# EAGLE board Optronik (EAGLE 7.5.0)
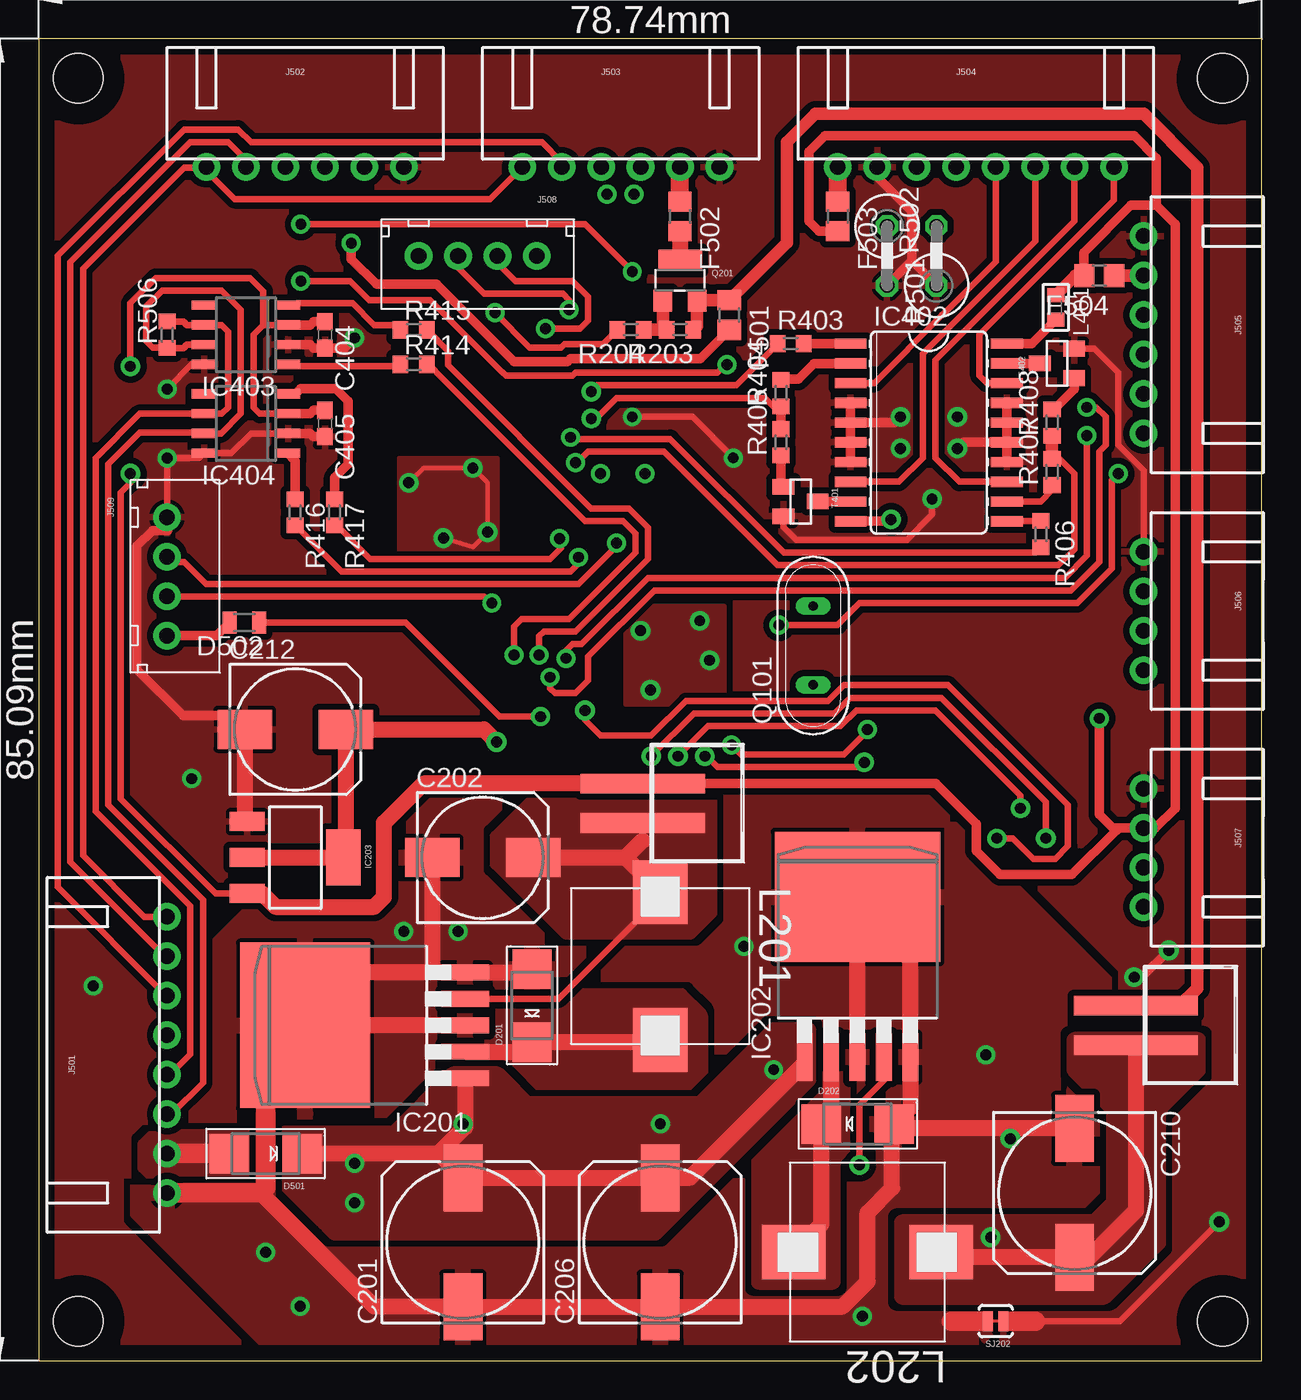
[diagram p0: board, top side]
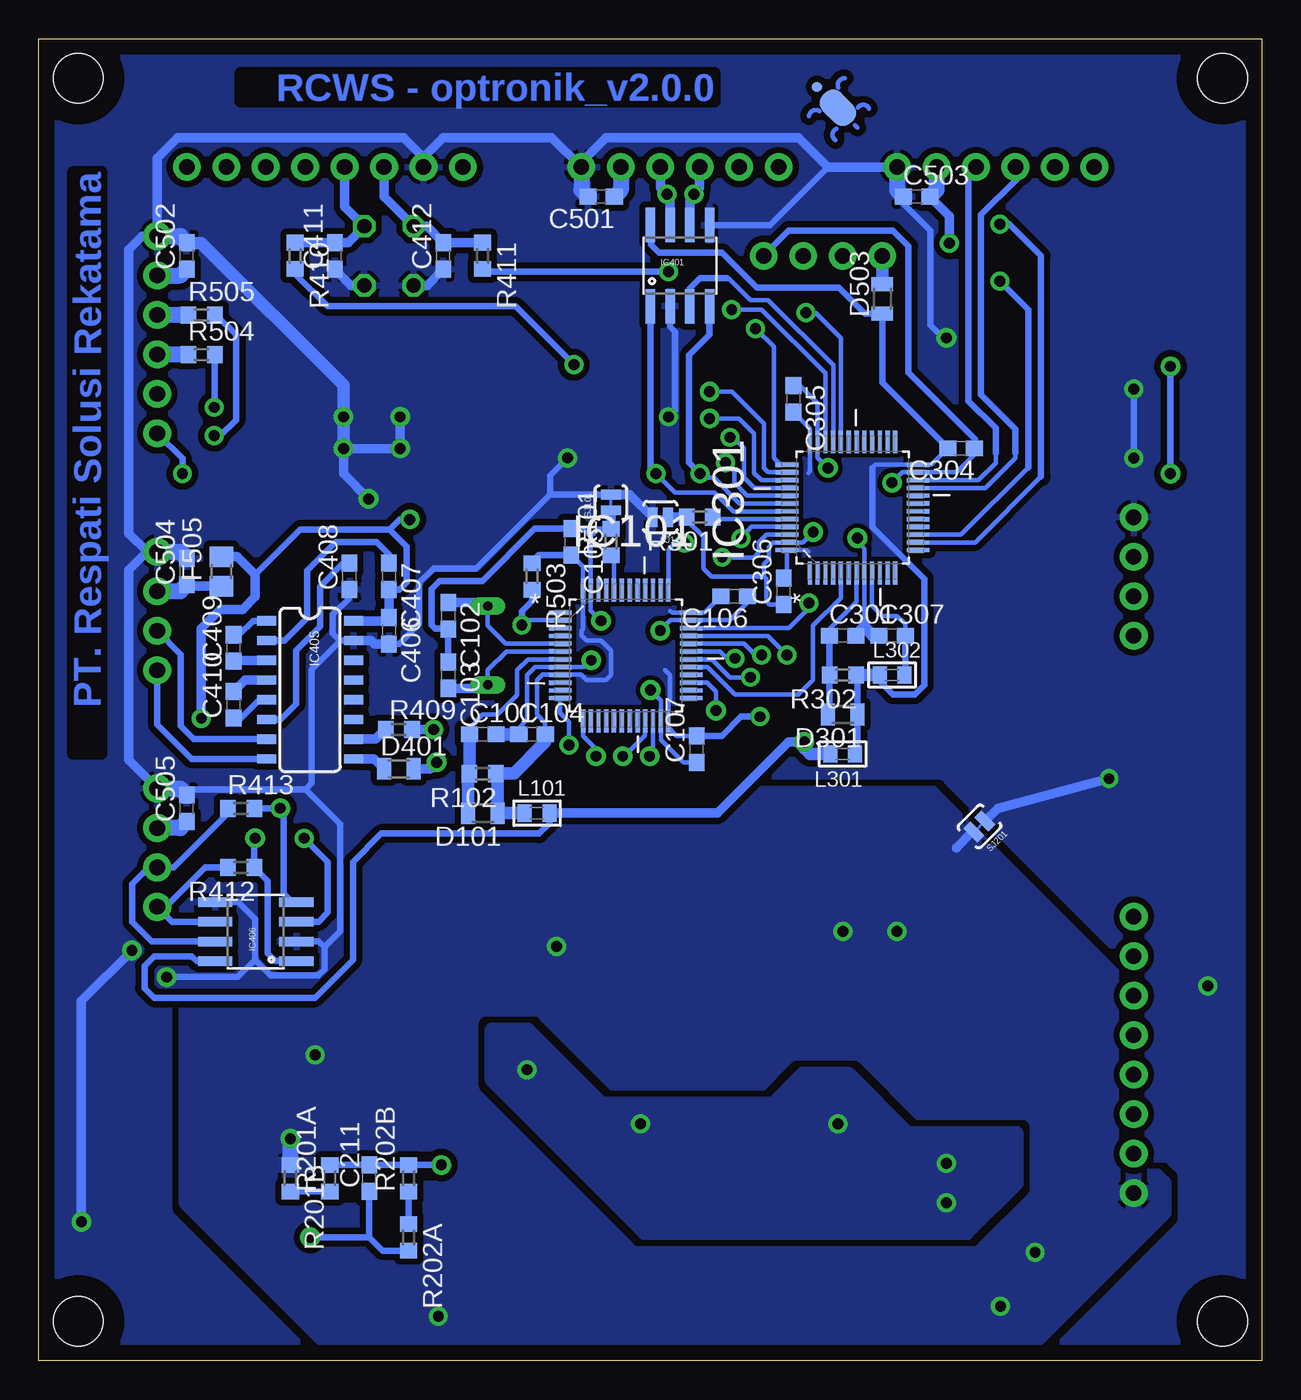
[diagram p1: board, bottom side, seen from below]

Size 78.74 x 85.09 mm. Coordinates in mm from the lower left corner, seen from the top.
Outline: 0,0 78.74,0 78.74,85.09 0,85.09 0,0
Copper layers (1*16): Top 0.035mm / dielectric 1.5mm / Bottom 0.035mm
Design rules "default": minimum track width 10mil, minimum drill 24mil, track to track 8mil, track to pad 8mil, pad to pad 8mil, via to via 8mil, smd to smd 8mil, copper to edge 40mil, drill to drill 8mil, minimum pad ring 10mil, minimum via ring 8mil, stop-mask expansion 4mil, vias tented up to drill 0mil, thermal gap 10mil
Net classes: 0 default: width 0.406 mm, drill 0.59 mm, clearance 0.305 mm; 1 ic: width 0.254 mm, drill 0.59 mm, clearance 0.203 mm; 2 power: width 0.61 mm, drill 0.59 mm, clearance 0.305 mm
Holes 3.2 mm at 2.54,2.54 76.2,2.54 76.2,82.55 2.54,82.55
tRestrict: area 0,0 to 5.1,5.1; area 73.7,0 to 78.7,5.1; area 73.7,80 to 78.7,85.1; area 0,80 to 5.1,85.1
bRestrict: area 0,0 to 5.1,5.1; area 73.7,0 to 78.7,5.1; area 73.7,80 to 78.7,85.1; area 0,80 to 5.1,85.1

## Footprints (pad centres in the part's own frame; a part is rotated, then mirrored left to right if it is on the bottom)
C0603 = smd 1.1 x 1: 1 -0.85,0; 2 0.85,0
153CLV-1012 = smd 4.3 x 2.5: + 4.15,0; - -4.15,0
153CLV-0810 = smd 3.5 x 2.5: + 3.25,0; - -3.25,0
MICROMELF-W = smd 0.9 x 1.4: A 0.95,0; C -0.95,0
SMADIODE = smd 2.54 x 2.54: A 2.349,0; C -2.349,0
L0805 = smd 1.3 x 1.5: 1 -0.95,0; 2 0.95,0
QFP50P900X900X160-48N = smd 1.473 x 0.279: 1 -4.216,2.743; 2 -4.216,2.261; 3 -4.216,1.753; 4 -4.216,1.245; 5 -4.216,0.762; 6 -4.216,0.254; 7 -4.216,-0.254; 8 -4.216,-0.762; 9 -4.216,-1.245; 10 -4.216,-1.753; 11 -4.216,-2.261; 12 -4.216,-2.743; 25 4.216,-2.743; 26 4.216,-2.261; 27 4.216,-1.753; 28 4.216,-1.245; 29 4.216,-0.762; 30 4.216,-0.254; 31 4.216,0.254; 32 4.216,0.762; 33 4.216,1.245; 34 4.216,1.753; 35 4.216,2.261; 36 4.216,2.743 | smd 0.279 x 1.473: 13 -2.743,-4.216; 14 -2.261,-4.216; 15 -1.753,-4.216; 16 -1.245,-4.216; 17 -0.762,-4.216; 18 -0.254,-4.216; 19 0.254,-4.216; 20 0.762,-4.216; 21 1.245,-4.216; 22 1.753,-4.216; 23 2.261,-4.216; 24 2.743,-4.216; 37 2.743,4.216; 38 2.261,4.216; 39 1.753,4.216; 40 1.245,4.216; 41 0.762,4.216; 42 0.254,4.216; 43 -0.254,4.216; 44 -0.762,4.216; 45 -1.245,4.216; 46 -1.753,4.216; 47 -2.261,4.216; 48 -2.743,4.216
D2PAK = smd 3.05 x 1.016: 1 10.305,-3.404; 2 10.305,-1.702; 3 10.305,0; 4 10.305,1.702; 5 10.305,3.404 | smd 8.38 x 10.66: 6 0,0
SOT223 = smd 1.219 x 2.235: 1 -2.311,-3.099; 2 0,-3.099; 3 2.311,-3.099 | smd 3.6 x 2.2: 4 0,3.099
SO08 = smd 0.61 x 2.21: 1 -1.905,-2.616; 2 -0.635,-2.616; 3 0.635,-2.616; 4 1.905,-2.616; 5 1.905,2.616; 6 0.635,2.616; 7 -0.635,2.616; 8 -1.905,2.616
SO20W = smd 0.66 x 2.032: 1 -5.715,-5.029; 2 -4.445,-5.029; 3 -3.175,-5.029; 4 -1.905,-5.029; 5 -0.635,-5.029; 6 0.635,-5.029; 7 1.905,-5.029; 8 3.175,-5.029; 9 4.445,-5.029; 10 5.715,-5.029; 11 5.715,5.029; 12 4.445,5.029; 13 3.175,5.029; 14 1.905,5.029; 15 0.635,5.029; 16 -0.635,5.029; 17 -1.905,5.029; 18 -3.175,5.029; 19 -4.445,5.029; 20 -5.715,5.029
SOIC-8 = smd 0.6 x 1.6: 1 -1.905,-2.7; 2 -0.635,-2.7; 3 0.635,-2.7; 4 1.905,-2.7; 5 1.905,2.7; 6 0.635,2.7; 7 -0.635,2.7; 8 -1.905,2.7
SO016 = smd 0.6 x 1.2: 1 -4.445,-2.8; 2 -3.175,-2.8; 3 -1.905,-2.8; 4 -0.635,-2.8; 5 0.635,-2.8; 6 1.905,-2.8; 7 3.175,-2.8; 8 4.445,-2.8; 9 4.445,2.8; 10 3.175,2.8; 11 1.905,2.8; 12 0.635,2.8; 13 -0.635,2.8; 14 -1.905,2.8; 15 -3.175,2.8; 16 -4.445,2.8
XH-2-VERT-SMD = smd 1.27 x 8: 1 -1.27,-0.5; 2 1.27,-0.5
XH-8-RA = drill 1 pad 1.778: 1 -8.89,0; 2 -6.35,0; 3 -3.81,0; 4 -1.27,0; 5 1.27,0; 6 3.81,0; 7 6.35,0; 8 8.89,0
XH-6-RA = drill 1 pad 1.778: 1 -6.35,0; 2 -3.81,0; 3 -1.27,0; 4 1.27,0; 5 3.81,0; 6 6.35,0
XH-4-RA = drill 1 pad 1.778: 1 -3.81,0; 2 -1.27,0; 3 1.27,0; 4 3.81,0
XH-4-VERT = drill 1 pad 1.778: 1 -3.81,0; 2 -1.27,0; 3 1.27,0; 4 3.81,0
L0603 = smd 0.9 x 1.1: 1 -0.794,0; 2 0.794,0
PA4342 = smd 3.5 x 4.1: P$1 0,4.75; P$2 0,-4.75
QS = drill 0.61 long: 1 -2.54,0; 2 2.54,0
SOT23-W = smd 1.2 x 1.4: 1 -1.1,-1.3; 2 1.1,-1.3 | smd 2.8 x 1.4: 3 0,1.3
R0603 = smd 1 x 1.1: 1 -0.85,0; 2 0.85,0
0411V = drill 0.914 octagon: 1 -2.54,0; 2 1.27,0
SJ_2S-TRACE = smd 0.635 x 1.27: 1 -0.508,0; 2 0.508,0
SOT23 = smd 1 x 1.4: 1 -0.95,-1.1; 2 0.95,-1.1; 3 0,1.1
KURRO-LOGO = smd 2.54 x 1.651 rotated 45 bottom: P$1 0,0 | smd 0.635 x 0.635 rotated 45 bottom: P$2 1.347,1.347

## Placement (x,y rotation side)
C101  100n  [C0603]  50.16,40.32 0 bottom
C102  22p  [C0603]  52.39,47.94 270 bottom
C103  22p  [C0603]  52.39,44.13 270 bottom
C104  100n  [C0603]  46.99,40.32 0 bottom
C105  100n  [C0603]  44.45,52.7 270 bottom
C106  100n  [C0603]  33.97,49.21 180 bottom
C107  100n  [C0603]  36.4,39.37 90 bottom
C201  470u/35V  [153CLV-1012]  27.3,7.62 90 top
C202  1000u/6V3  [153CLV-0810]  28.57,32.38 0 top
C206  470u/35V  [153CLV-1012]  40.01,7.62 90 top
C210  470u/35V  [153CLV-1012]  66.67,10.79 270 top
C211  10n  [C0603]  57.47,11.75 90 bottom
C212  1000u/6V3  [153CLV-0810]  16.51,40.64 0 top
C301  100n  [C0603]  26.99,46.67 0 bottom
C304  100n  [C0603]  19.37,58.74 180 bottom
C305  100n  [C0603]  30.16,61.91 270 bottom
C306  100n  [C0603]  30.8,49.53 90 bottom
C307  100n  [C0603]  23.81,46.67 0 bottom
C404  100n  [C0603]  18.41,66.04 270 top
C405  100n  [C0603]  18.41,60.33 270 top
C406  1u  [C0603]  56.2,46.99 270 bottom
C407  1u  [C0603]  56.2,50.48 270 bottom
C408  1u  [C0603]  58.74,50.48 90 bottom
C409  1u  [C0603]  66.2,45.88 90 bottom
C410  1u  [C0603]  66.2,42.23 90 bottom
C411  100n  [C0603]  59.69,71.12 90 bottom
C412  100n  [C0603]  52.7,71.12 90 bottom
C501  100n  [C0603]  42.55,74.93 180 bottom
C502  100n  [C0603]  69.22,71.12 90 bottom
C503  100n  [C0603]  22.23,74.93 0 bottom
C504  100n  [C0603]  69.22,50.8 90 bottom
C505  100n  [C0603]  69.22,35.56 90 bottom
D101  SCHOTTKY  [MICROMELF-W]  50.16,35.24 180 bottom
D201  SS34  [SMADIODE]  31.75,22.86 90 top
D202  SS34  [SMADIODE]  52.7,15.24 0 top
D301  SCHOTTKY  [MICROMELF-W]  26.99,41.59 180 bottom
D401  SCHOTTKY  [MICROMELF-W]  55.56,38.1 0 bottom
D501  SS34  [SMADIODE]  14.61,13.34 180 top
D502  SCHOTTKY  [MICROMELF-W]  13.23,47.51 180 top
D503  SCHOTTKY  [MICROMELF-W]  24.45,68.36 90 bottom
F501  500mA  [L0805]  44.45,67.31 270 top
F502  500mA  [L0805]  41.27,73.66 270 top
F503  500mA  [L0805]  51.44,73.66 270 top
F504  500mA  [L0805]  68.26,69.85 180 top
F505  500mA  [L0805]  66.99,50.8 90 bottom
IC101  STM32F103C8T6  [QFP50P900X900X160-48N]  40.96,45.4 0 bottom
IC201  LM2596S-5V  [D2PAK]  17.14,21.59 0 top
IC202  LM2596S-ADJ  [D2PAK]  52.7,29.84 270 top
IC203  [SOT223]  16.51,32.38 270 top
IC301  STM32F103C8T6  [QFP50P900X900X160-48N]  26.35,54.93 90 bottom
IC401  RS485SOIC  [SO08]  37.47,70.48 0 bottom
IC402  L293DD  [SO20W]  57.29,59.75 270 top
IC403  MCP2561-E/SN  [SOIC-8]  13.34,66.04 90 top
IC404  MCP2561-E/SN  [SOIC-8]  13.34,60.33 90 top
IC405  MAX232SOIC16  [SO016]  61.28,43.18 270 bottom
IC406  RS485SOIC  [SO08]  64.77,27.62 90 bottom
J201  [XH-2-VERT-SMD]  39.37,35.88 270 top
J202  [XH-2-VERT-SMD]  71.12,21.59 270 top
J501  PANEL  [XH-8-RA]  8.26,19.68 90 top
J502  SONY  [XH-6-RA]  17.14,76.83 0 top
J503  THERMAL_DALI_VIDEO  [XH-6-RA]  37.47,76.83 0 top
J504  THERMAL_DALI_MOTOR  [XH-8-RA]  60.33,76.83 0 top
J505  LRF_NOPTEL  [XH-6-RA]  71.12,66.04 270 top
J506  IMU  [XH-4-RA]  71.12,48.26 270 top
J507  GPS  [XH-4-RA]  71.12,33.02 270 top
J508  MCU_CAM_PROG  [XH-4-VERT]  28.26,71.12 180 top
J509  MCU_MAIN_PROG  [XH-4-VERT]  8.26,50.48 270 top
L101  FB_0603  [L0603]  46.67,35.24 0 bottom
L201  33uH  [PA4342]  40.01,25.4 180 top
L202  33uH  [PA4342]  53.34,6.99 90 top
L301  FB_0603  [L0603]  26.99,39.05 180 bottom
L302  FB_0603  [L0603]  23.81,44.13 0 bottom
L401  FB_0603  [L0603]  65.47,67.81 270 top
Q101  8MHz  [QS]  49.85,46.04 90 top
Q201  A03401  [SOT23-W]  41.27,69.53 0 top
R101  100K  [R0603]  41.91,52.7 90 bottom
R102  100K  [R0603]  50.16,37.78 180 bottom
R201A  120R  [R0603]  60.01,11.75 90 bottom
R201B  120R  [R0603]  62.55,11.75 270 bottom
R202A  1k  [R0603]  54.93,7.94 270 bottom
R202B  1k  [R0603]  54.93,11.75 90 bottom
R203  10k  [R0603]  41.27,66.36 180 top
R204  100R  [R0603]  38.1,66.36 180 top
R301  100K  [R0603]  36.2,54.29 180 bottom
R302  100K  [R0603]  26.99,44.13 180 bottom
R403  100R  [R0603]  48.4,65.47 0 top
R404  100R  [R0603]  47.76,62.29 90 top
R405  1k  [R0603]  47.76,59.12 90 top
R406  100R  [R0603]  64.52,53.2 270 top
R407  100R  [R0603]  65.23,57.21 90 top
R408  1k  [R0603]  65.23,60.39 90 top
R409  100R  [R0603]  55.56,40.64 0 bottom
R410  100R  [R0603]  62.23,71.12 270 bottom
R411  100R  [R0603]  50.16,71.12 270 bottom
R412  100  [R0603]  65.72,31.75 180 bottom
R413  100  [R0603]  65.72,35.56 0 bottom
R414  100R  [R0603]  24.13,64.14 0 top
R415  100R  [R0603]  24.13,66.36 0 top
R416  100R  [R0603]  16.51,54.61 270 top
R417  100R  [R0603]  19.05,54.61 270 top
R501  1R  [0411V]  54.61,70.48 270 top
R502  1R  [0411V]  57.78,71.75 90 top
R503  10k  [R0603]  46.99,50.48 270 bottom
R504  100R  [R0603]  68.26,64.77 0 bottom
R505  100R  [R0603]  68.26,67.31 0 bottom
R506  120R  [R0603]  8.26,66.04 90 top
SJ1  [SJ_2S-TRACE]  38.73,54.29 180 bottom
SJ101  [SJ_2S-TRACE]  41.91,55.24 90 bottom
SJ201  SOLDERJUMPERTRACE  [SJ_2S-TRACE]  18.19,34.38 225 bottom
SJ202  SOLDERJUMPERTRACE  [SJ_2S-TRACE]  61.59,2.54 180 top
T401  1N2222A  [SOT23]  49.03,55.31 270 top
T402  1N2222A  [SOT23]  65.54,64.2 90 top
U$1  KURRO_FOOTPRINT  [KURRO-LOGO]  27.3,80.64 0 top

## Library data of the parts
C101-C107 C201 C202 C206 C210 C212 C301 C304-C307 C406-C412 C501-C505 R101 R102 R201A R201B R202A R202B R203 R204 R301 R302 R403-R408 R410-R413 R501-R505 = resistor
C211 C404 C405 F501-F505 R409 R414-R417 = rcl
D101 D301 D401 D502 D503 = diode
D201 D202 D501 IC402 = adafruit
IC101 IC301 = ST Microelctronics_By_element14_Batch_1; LINK: https://www.tokopedia.com/embedded-world/stm32-stm32f103c8t6-lqfp48-arm-based-microcontroller-mcu-lqfp-48-au02; MPN: STM32F103CBT6; OC_FARNELL: 1606327; OC_NEWARK: 11N8296; PACKAGE: QFP-48; SUPPLIER: STMICROELECTRONICS
IC201 IC202 = ON Semiconductor_By_element14_Batch_1
IC203 SJ201 SJ202 U$1 = SparkFun
IC401 IC406 = SparkFun-DigitalIC
IC403 IC404 = microchip
IC405 = SparkFun-DigitalIC; PROD_ID: IC-08171
J201 J202 J501-J509 = SparkFun-Connectors
L101 L301 L302 L401 = rc-master
L201 L202 Q201 = scorpion
Q101 = special
R506 = rcl; DNP: T
SJ1 SJ101 = SparkFun-Passives
T401 T402 = SparkFun-DiscreteSemi

## Nets
+3V3: C212.+ IC203.2 IC203.4 IC406.8 L101.2 L301.2
+5V: C404.1 C405.1 C406.1 C407.2 C505.1 F503.2 F504.2 F505.2 IC203.3 IC402.10 IC403.3 IC404.3 IC405.16 J201.1 J507.2 L401.1
+12V: F501.1 J202.1 Q201.2 R203.1
+24V [power]: C201.+ C206.+ D501.C IC201.1 IC202.1
AGND [ic]: C101.2 C102.2 C103.1 C104.1 C105.1 C106.1 C107.1 IC101.8 IC101.23 IC101.35 IC101.47 R101.2 SJ101.1
AGND1 [ic]: C301.2 C304.1 C305.1 C306.1 C307.1 IC301.8 IC301.23 IC301.35 IC301.47 J508.1 R301.2 SJ1.1
BOOT0 [ic]: IC101.44 R101.1
BOOT1 [ic]: IC301.44 R301.1
BUS1_RXD [ic]: IC101.32 R415.2
BUS1_TXD [ic]: IC101.33 R414.2
BUS2_RXD [ic]: IC301.45 R417.2
BUS2_TXD [ic]: IC301.46 R416.2
BUS_CANH: IC403.7 IC404.7 J501.3 R506.1
BUS_CANL: IC403.6 IC404.6 J501.4 R506.2
FEED1: C211.2 IC202.4 R201A.2 R202B.2
GND: C212.- C404.2 C405.2 C406.2 C408.1 C411.1 C412.1 C501.2 C502.2 C503.1 C504.2 C505.2 IC203.1 IC401.2 IC401.5 IC402.4 IC402.5 IC402.6 IC402.7 IC402.14 IC402.15 IC402.16 IC402.17 IC403.2 IC403.8 IC404.2 IC404.8 IC405.15 IC406.2 IC406.5 J502.6 J503.6 J504.2 J505.1 J506.1 J507.1 J509.1 R501.2 R502.1 SJ1.2 SJ101.2 SJ201.1 SJ202.1 T401.2 T402.2
GPS_A_TX: IC406.6 J507.4 R412.2
GPS_B_RX: IC406.7 J507.3 R413.1
GPS_RTS [ic]: IC101.27 IC406.3
GPS_RXD [ic]: IC101.21 IC406.4 R413.2
GPS_TXD [ic]: IC101.22 IC406.1 R412.1
IMU_RX: IC405.7 J506.3
IMU_RXD [ic]: IC101.12 R409.2
IMU_TX: IC405.8 J506.4
IMU_TXD [ic]: D401.A IC101.13
LRF_EN [ic]: IC101.2 J505.6 R503.2
LRF_RXD [ic]: IC101.30 R504.2
LRF_TXD [ic]: IC101.31 R505.2
MCO [ic]: IC101.29 IC301.5
N$1 [ic]: IC301.30
N$2 [ic]: IC101.45
N$3 [ic]: IC301.6
N$4 [ic]: IC101.40
N$5 [power]: D201.C IC201.2 L201.P$1
N$6 [ic]: C103.2 IC101.6 Q101.1
N$7 [ic]: C102.1 IC101.5 Q101.2
N$8 [ic]: IC101.46
N$9 [ic]: IC301.31
N$10 [ic]: IC101.20
N$11 [ic]: IC101.3
N$12 [ic]: IC101.19
N$13 [ic]: IC101.42
N$14 [ic]: IC101.43
N$15 [power]: D501.A J501.2
N$16 [power]: D202.C IC202.2 L202.P$1
N$17 [ic]: R201A.1 R201B.2
N$18: R202A.1 R202B.1
N$19 [ic]: IC101.18
N$20 [ic]: IC101.38
N$21 [ic]: IC301.27
N$22: IC402.20 L401.2
N$23 [ic]: IC101.17
N$24 [ic]: IC301.2
N$25 [ic]: IC101.15
N$26 [ic]: IC101.14
N$27 [ic]: IC101.25
N$28 [ic]: IC101.26
N$29: C202.+ IC201.4 J201.2 L201.P$2
N$30 [ic]: IC101.28
N$31 [ic]: C408.2 IC405.6
N$32 [ic]: C409.2 IC405.1
N$33 [ic]: C410.2 IC405.4
N$34 [ic]: IC101.39
N$35: F503.1 J504.1
N$36 [ic]: IC301.16
N$37 [ic]: IC301.4
N$38 [ic]: IC301.1
N$39: Q201.1 R203.2 R204.1
N$40 [ic]: IC301.10
N$41 [ic]: D502.A J509.4
N$42 [ic]: IC101.16
N$43: IC402.12 R407.1
N$44 [ic]: IC301.11
N$45 [ic]: IC301.12
N$46 [ic]: IC301.13
N$47: C501.1 F502.1 J503.5
N$48: C502.1 F504.1 J505.2
N$49: IC403.1 R414.1
N$50: IC402.2 R404.2
N$51 [ic]: IC101.41
N$52: C503.2 F501.2 J502.5
N$53 [ic]: IC101.11
N$54 [ic]: IC101.10
N$55: C504.1 F505.1 J506.2
N$56: J505.3 R505.1
N$57 [ic]: IC101.4
N$58 [ic]: IC101.1
N$59: J505.4 R504.1
N$60 [ic]: IC301.3
N$61 [ic]: IC301.25
N$62 [ic]: IC301.26
N$63: C210.+ C211.1 J202.2 L202.P$2 R202A.2
N$64 [ic]: IC301.28
N$65 [ic]: IC301.29
N$66 [ic]: IC301.17
N$67: IC403.4 R415.1
N$68: C409.1 IC405.3
N$69: C410.1 IC405.5
N$70 [ic]: IC301.20
N$71: IC404.1 R416.1
N$72: C407.1 IC405.2
N$73: IC404.4 R417.1
N$74: IC405.10 R409.1
N$75: D401.C IC405.9
N$76 [ic]: IC301.18
N$77 [ic]: IC402.1 R403.2
N$78 [ic]: IC402.11 R406.1
N$79 [ic]: IC301.19
N$80 [ic]: D503.A J508.4
N$89: R405.1 T401.1
N$90: IC402.9 T401.3
N$91: IC402.19 T402.3
N$92: R408.2 T402.1
RST [ic]: C101.1 D101.A IC101.7 R102.2
RST1 [ic]: C301.1 D301.A IC301.7 R302.2
SONY_RXD [ic]: IC301.21 J502.3
SONY_TXD [ic]: IC301.22 J502.4
SWCLK1 [ic]: IC101.37 J509.2
SWCLK2 [ic]: IC301.37 J508.2
SWDIO1 [ic]: IC101.34 J509.3
SWDIO2 [ic]: IC301.34 J508.3
TH_FOCUS+: IC402.13 J504.7
TH_FOCUS-: IC402.18 J504.8
TH_FOCUS_DIR [ic]: IC301.41 R407.2 R408.1
TH_FOCUS_PLS [ic]: IC301.40 R406.2
TH_ZOOM+: IC402.3 J504.5
TH_ZOOM-: IC402.8 J504.6
TH_ZOOM_DIR [ic]: IC301.39 R404.1 R405.2
TH_ZOOM_PLS [ic]: IC301.38 R403.1
THERMAL_A_TX: IC401.6 J503.3
THERMAL_ADC_FOCUS [ic]: IC301.14 R411.2
THERMAL_ADC_ZOOM [ic]: IC301.15 R410.2
THERMAL_B_RX: IC401.7 J503.4
THERMAL_FB_FOCUS: C412.2 J504.3 R411.1 R501.1
THERMAL_FB_ZOOM: C411.2 J504.4 R410.1 R502.2
THERMAL_PWR_EN [ic]: IC301.32 R204.2
THERMAL_RTS [ic]: IC301.33 IC401.3
THERMAL_RXD [ic]: IC301.42 IC401.4
THERMAL_TXD [ic]: IC301.43 IC401.1
THERMAL_VDD: F502.2 Q201.3
V- [power]: C201.- C202.- C206.- C210.- D201.A D202.A IC201.3 IC201.5 IC201.6 IC202.3 IC202.5 IC202.6 J501.1 R201B.1 SJ201.2 SJ202.2
VDD [ic]: C104.2 C105.2 C106.2 C107.2 D101.C D502.C IC101.9 IC101.24 IC101.36 IC101.48 L101.1 R102.1 R503.1
VDD1 [ic]: C304.2 C305.2 C306.2 D301.C D503.C IC301.24 IC301.36 IC301.48 IC401.8 L301.1 L302.1 R302.1
VDDA1 [ic]: C307.2 IC301.9 L302.2
VIDEO-: J501.8 J502.1 J503.1
VIDEO_SONY+: J501.7 J502.2
VIDEO_THERMAL+: J501.6 J503.2

## Tracks (layer width: path | path; a pad name or v marks a point on that pad's centre or on a via)
+3V3  (via drill 0.7 pad 1.27)
  Top 1.016: IC203.2 IC203.4 19.76,32.54 C212.+ 28.65,40.64 v29.46,39.83
  Bottom 0.406: L101.2 45.88,34.59 46.53,33.93 56.69,33.93 58.52,32.11 58.52,25.81 60.96,23.37 71.32,23.37 71.93,23.98 71.93,25.4 71.32,26.01 68.89,26.01 68.59,25.72 IC406.8
  Bottom 0.61: L101.2 35.06,35.24 30.48,39.83 v29.46,39.83
  Bottom 0.813: L301.2 29.1,39.05 29.46,39.42 v29.46,39.83
+5V  (via drill 0.7 pad 1.22, 0.7 pad 1.27)
  Top 0.406: IC203.3 11.38,30.07 5.28,36.17 5.28,55.88 5.89,56.49 v5.89,57.1 | IC404.3 14.22,60.96 13.82,61.37 13.82,66.04 14.45,66.67 | IC403.3 14.45,66.67 | 14.45,66.67 14.45,68.86 13.61,69.7 7.52,69.7 5.89,68.07 v5.89,64.01
  Top 0.61: IC403.3 17.46,66.67 17.68,66.89 C404.1 | IC404.3 17.46,60.96 17.68,61.17 C405.1 | J201.1 57.75,37.15 60.35,34.54 60.35,32.82 61.87,31.29 66.5,31.29 69.32,34.11 | IC402.10 54.75,54.04 v54.86,54.15 | 69.49,34.29 J507.2 71.88,34.29 73.15,35.56 73.15,73.15 71.93,74.37 | 69.49,34.29 69.34,34.29 | 69.32,34.11 69.49,34.29 | v68.28,41.35 68.28,35.15 69.32,34.11 | 71.93,74.37 70.31,74.37 67.26,71.32 67.26,69.9 F504.2 | F503.2 50.23,72.71 49.58,73.36 49.58,77.83 50.6,78.84 70.51,78.84 71.93,77.42 71.93,74.37
  Top 0.813: F504.2 66.72,69.85 L401.1
  Top 1.016: IC203.3 14.38,30.07 15.24,29.21 21.59,29.21 22.23,29.84 22.23,34.62 24.75,37.15 J201.1
  Bottom 0.406: 56.17,53.51 55.07,52.4 55.07,50.09 55.51,49.64 56.19,49.64 C407.2 | v5.89,57.1 v5.89,64.01 | v54.86,54.15 55.52,54.15 56.17,53.51 | 56.17,53.51 61.91,53.51 64.82,50.6
  Bottom 0.61: IC405.16 56.41,47.62 C406.1 C407.2 | v68.28,41.35 68.28,47.14 67.06,48.36 65.63,48.36 64.82,49.17 64.82,50.6 65.97,51.75 F505.2 67.31,51.75
  Bottom 1.016: C505.1 69.64,34.29 J507.2
+12V
  Top 0.813: R203.1 42.38,66.61 Q201.2 42.41,68.27 F501.1 | J202.1 70.72,22.76 73.36,22.76 74.57,23.98 74.57,76.81 71.12,80.26 49.99,80.26 48.16,78.44 48.16,71.97 F501.1 | 44.47,68.28 F501.1
+24V  (via drill 0.7 pad 1.22)
  Top 1.016: D501.C 25.74,13.34 | 25.74,13.34 C201.+ C206.+ 41.93,11.77 49.3,19.14 IC202.1 | IC201.1 27.45,15.04 25.74,13.34
  other vias: 20.32,10.16 20.32,12.7 27.3,15.24 40.01,15.24 47.31,18.73
  pour Top (isolate 0.406, no thermals): 15.88,12.38 15.88,11.43 18.1,9.21 18.41,8.89 18.73,8.57 19.05,8.26 39.69,8.26 49.53,18.1 49.53,21.27 47.31,21.27 42.55,16.51 31.43,16.51 29.84,18.1 29.53,18.41 26.67,18.41 22.86,14.61 15.88,14.61
  pour Bottom (isolate 0.406, no thermals): 15.88,14.61 15.88,11.43 19.05,8.26 39.69,8.26 49.53,18.1 49.53,21.27 47.31,21.27 42.55,16.51 31.43,16.51 29.53,18.41 26.67,18.41 22.86,14.61
AGND  (via drill 0.7 pad 1.27)
  Bottom 0.279: C106.1 33.12,48.79 34.25,47.66 IC101.35 38.06,47.66 v38.73,46.99 | 43.22,53.06 IC101.47 43.22,48.3 v42.55,47.62 | 43.22,53.06 43.71,53.55 C105.1 | R101.2 42.72,53.55 43.22,53.06 | v43.18,45.09 43.62,44.64 IC101.8 46.8,44.64 47.31,44.13 47.31,41.27 47.84,40.74 C104.1 | v39.37,43.18 38.7,42.51 IC101.23 38.7,39.97 37.25,38.52 C107.1
  Bottom 0.406: C103.1 C102.2 52.44,47.14 53.24,47.14 53.44,47.35 53.44,49.68 52.93,50.19 50.19,50.19 46.83,53.55 C105.1
  Bottom 0.61: R101.2 SJ101.1
  Bottom 0.813: C101.2 C104.1
  pour Top (isolate 0.305, rank 5): 37.78,42.23 44.13,42.23 44.13,48.58 37.78,48.58
AGND1  (via drill 0.7 pad 1.27)
  Top 0.279: v26.05,52.95 27.94,52.39 v28.89,53.34 28.89,56.52 v27.94,57.47 24.77,57.47 v23.81,56.52
  Bottom 0.279: v27.94,57.47 28.61,58.14 IC301.35 28.61,61.63 29.74,62.76 C305.1 | v28.89,53.34 29.57,52.67 IC301.47 31.47,52.67 31.75,52.39 31.75,51.59 32.07,51.28 32.07,50.48 | v23.81,56.52 23.14,57.19 IC301.23 19.65,57.19 18.52,58.32 C304.1 | v26.05,52.95 25.59,52.26 IC301.8 25.59,47.22 | C306.1 31.69,48.68 31.91,48.9 31.91,50.32 32.07,50.48 | 32.07,50.48 35.45,50.48 35.97,51 35.97,53.03 37.05,54.11 R301.2
  Bottom 0.406: C304.1 18.49,58.76 18.49,59.33 22.76,63.6 22.76,71.73 23.77,72.75 30.48,72.75 31.57,71.65 31.57,71.61 J508.1
  Bottom 0.61: R301.2 SJ1.1
  Bottom 0.813: C307.1 25.04,46.67 25.59,47.22 C301.2
  pour Top (isolate 0.305, rank 5): 23.18,51.75 29.53,51.75 29.53,58.1 23.18,58.1
BOOT0
  Bottom 0.279: IC101.44 41.72,51.66 R101.1
BOOT1
  Bottom 0.279: IC301.44 35.22,54.17 R301.1
BUS1_RXD  (via drill 0.7 pad 1.22)
  Top 0.406: R415.2 26.35,64.98 26.35,64.07 35.56,54.86 38,54.86 39.22,53.65 39.22,51.61 34.54,46.94 32.51,46.94 32.21,46.63 v32.21,45.41
  Bottom 0.279: IC101.32 33.36,46.16 32.61,45.41 v32.21,45.41
BUS1_TXD  (via drill 0.7 pad 1.22)
  Top 0.406: R414.2 25.08,64.14 26.04,63.18 26.04,63.17 35.15,54.05 37.59,54.05 38.41,53.24 38.41,52.02 34.14,47.75 31.09,47.75 30.58,47.24 v30.58,45.41
  Bottom 0.279: IC101.33 31.81,46.65 v30.58,45.41
BUS2_RXD  (via drill 0.7 pad 1.22)
  Top 0.406: R417.2 19.19,53.76 21.34,51.61 32.92,51.61 33.63,52.32 v33.53,52.93
  Bottom 0.279: IC301.45 32.88,53.68 v33.53,52.93
BUS2_TXD  (via drill 0.7 pad 1.22)
  Top 0.406: R416.2 16.55,53.76 19.51,50.8 34.24,50.8 34.65,51.21 v34.75,51.71
  Bottom 0.279: IC301.46 31.91,53.17 32.38,52.7 32.38,52.05 32.72,51.71 v34.75,51.71
BUS_CANH
  Top 0.406: J501.3 8.56,15.88 10.57,17.88 10.57,29.67 4.47,35.76 4.47,57.71 6.5,59.74 10.58,59.74 IC404.7 11.73,59.69 13.01,60.96 13.01,67.67 11.79,68.89 7.92,68.89 6.91,67.87 6.91,65.63 7.32,65.23 8.22,65.23 R506.1 9.31,65.19 9.53,65.41 IC403.7
BUS_CANL
  Top 0.406: J501.4 8.46,18.41 9.75,19.71 9.75,29.26 3.66,35.36 3.66,58.12 6.5,60.96 IC404.6 11.79,60.96 12.19,61.37 12.19,66.24 11.79,66.65 10.66,66.65 IC403.6 9.53,66.67 9.31,66.89 R506.2
FEED1  (via drill 0.7 pad 1.27)
  Top 0.406: IC202.4 54.41,18.03 52.83,16.46 v52.83,12.6
  Bottom 0.406: v52.83,12.6 R202B.2 C211.2 R201A.2
GND  (via drill 0.7 pad 1.22, 0.7 pad 1.27)
  Top 0.406: IC404.2 13.65,59.69 12.38,58.42 IC404.8 10.32,58.1 v8.26,58.1 8.26,53.57 | 12.38,41.52 C212.- | 64.14,2.54 69.6,2.54 v76,8.94 | T402.2 67.95,65.15 69.49,63.6 69.49,58.93 71.12,57.3 J506.1 | T401.2 47.94,53.66 48.77,52.83 55.88,52.83 57.51,54.46 v57.51,55.47 | IC403.8 9.84,64.14 v8.26,62.55 | v38.2,60.76 42.06,60.76 v44.7,58.12
  Top 0.61: IC402.4 IC402.5 | IC402.5 IC402.6 IC402.7 | IC402.17 IC402.16 IC402.15 | IC402.15 IC402.14 | SJ202.1 62.55,2.54 | IC403.2 17.46,65.41 17.68,65.19 C404.2 19.67,65.19 v20.32,65.84 | IC404.2 17.46,59.69 17.68,59.48 C405.2 | J504.2 53.98,76.2 56.2,73.98 56.2,70.8 | 56.2,70.8 R502.1 | R501.2 56.2,70.8 | v70.51,24.69 71.02,24.69 v72.75,26.42 | IC402.5 55.1,60.39 v55.47,60.76 | IC402.15 59.52,59.12 v59.13,58.73 | 12.38,41.52 9.28,41.52 6.3,44.5 6.3,52.43 7.32,53.44 8.3,53.44
  Top 1.016: C212.- 13.26,34.85 IC203.1
  Top 1.27: 62.55,2.54 64.14,2.54
  Bottom 0.406: IC405.15 59.38,46.35 | 59.38,46.35 59.83,46.8 59.83,48.02 58.81,49.03 58.81,49.56 C408.1 | IC406.2 60.72,26.99 60.35,26.62 | 60.35,26.62 60.35,25.2 60.76,24.79 63.8,24.79 64.82,25.81 | 64.82,25.81 64.82,28.45 65.9,29.53 IC406.5 | IC401.5 31.67,73.1 27.94,76.83 | 61.57,36.78 59.33,34.54 59.33,27.64 60.35,26.62 | v70.51,24.69 65.94,24.69 64.82,25.81 | 61.57,36.78 68.85,36.78 C505.2 | SJ101.2 45.85,55.75 | C406.2 55.56,46.14 54.25,47.45 54.25,50.09 53.34,51 50.6,51 45.85,55.75 | 59.38,46.35 59.38,46.28 61.16,44.5 61.16,37.19 61.57,36.78 | C503.1 23.16,74.84 23.16,74.57 21.34,72.75 21.34,66.65 20.52,65.84 v20.32,65.84 | v8.26,62.55 v8.26,58.1 | IC401.2 38.1,66.55 37.8,66.24 37.8,61.16 v38.2,60.76 | 45.85,55.75 45.85,56.97 v44.7,58.12
  Bottom 0.61: C406.2 57.14,46.14 57.35,46.35 IC405.15 | J502.6 27.94,76.83 29.84,78.74 42.23,78.74 43.81,77.15 J503.6 45.72,78.74 52.7,78.74 53.98,77.47 | J504.2 53.98,77.47 | C412.1 53.76,69.22 R501.2 | R502.1 58.63,69.22 C411.1 | v76,8.94 76,23.16 v72.75,26.42 | 53.98,77.47 54,77.47 55.27,78.74 69.8,78.74 71.12,77.42 J505.1 72.08,72.39 72.95,71.53 72.95,53.24 71.78,52.07 | J506.1 71.78,52.07 | v55.47,60.76 v55.47,58.73 v59.13,58.73 59.13,57.1 v57.51,55.47 | 71.78,52.07 72.95,50.9 72.95,38.66 J507.1 | SJ101.2 40.7,55.75 SJ1.2 | SJ201.1 17.01,35.56 v9.84,37.47
  Bottom 0.813: C502.2 69.18,71.93 68.28,71.93 59.13,62.79 v59.13,60.76 v59.13,58.73
  Bottom 1.016: J505.1 69.64,72.39 C502.2 | J506.1 69.64,52.07 C504.2 | J507.1 69.64,36.83 C505.2 | J502.6 23.5,75.35 C503.1 | J503.6 43.81,75.35 C501.2
  other vias: 3.49,24.13
  pour Bottom (isolate 0.406, rank 6): 0,0 78.74,0 78.74,85.09 0,85.09
  pour Top (isolate 0.406, rank 6): 0,0 78.74,0 78.74,85.09 0,85.09
GPS_A_TX
  Bottom 0.406: IC406.6 70.17,28.26 J507.4 70.56,29.21 68.02,31.75 R412.2
GPS_B_RX
  Bottom 0.406: IC406.7 71.49,26.99 72.75,28.25 72.75,30.68 71.68,31.75 J507.3 70.05,31.75 66.57,35.23 R413.1
GPS_RTS  (via drill 0.7 pad 1.22, 0.7 pad 1.27)
  Top 0.406: v61.67,33.63 62.69,33.63 64.01,32.31 65.43,32.31 66.24,33.12 66.24,35.76 58.52,43.48 51.82,43.48 50.8,42.47 41.66,42.47 39.42,40.23 36.17,40.23 35.15,41.25 v35.15,41.86
  Bottom 0.279: IC101.27 35.73,43.65 35.15,43.08 v35.15,41.86
  Bottom 0.406: IC406.3 60.74,28.26 60.15,28.85 60.15,32.11 v61.67,33.63
GPS_RXD  (via drill 0.7 pad 1.27)
  Top 0.406: v41.15,38.91 43.08,40.84 51.61,40.84 52.63,41.86 57.71,41.86 63.2,36.37 v63.2,35.56
  Bottom 0.279: IC101.21 39.71,40.25 41.05,38.91 v41.15,38.91
  Bottom 0.406: IC406.4 62.45,29.53 62.99,30.07 62.99,35.36 v63.2,35.56 R413.2
GPS_TXD  (via drill 0.7 pad 1.27)
  Top 0.406: v39.42,38.91 42.16,41.66 51.21,41.66 52.22,42.67 58.12,42.67 64.82,35.97 v64.82,33.63
  Bottom 0.279: IC101.22 39.2,39.13 v39.42,38.91
  Bottom 0.406: IC406.1 63.51,25.72 64.01,26.21 64.01,30.89 R412.1 64.87,33.58 v64.82,33.63
IMU_RX
  Bottom 0.406: IC405.7 68.76,40.01 69.6,40.84 69.6,45.47 J506.3
IMU_RXD  (via drill 0.7 pad 1.22)
  Top 0.406: v53.34,40.64 53.34,40.54 51.82,39.01 45.21,39.01 v44.6,39.62
  Bottom 0.279: IC101.12 45.17,41.68 44.6,41.11 v44.6,39.62
  Bottom 0.61: R409.2 v53.34,40.64
IMU_TX
  Bottom 0.406: IC405.8 68.9,38.73 71.12,40.96 J506.4
IMU_TXD  (via drill 0.7 pad 1.27)
  Top 0.406: v53.14,38.52 52.95,38.52 52.63,38.2 43.69,38.2 42.98,38.91 v42.88,38.91
  Bottom 0.279: IC101.13 43.7,40.21 42.88,39.38 v42.88,38.91
  Bottom 0.61: D401.A 53.56,38.1 v53.14,38.52
LRF_EN  (via drill 0.7 pad 1.22)
  Top 0.406: v47.65,47.35 51.41,47.35 52.83,48.77 66.85,48.77 69.09,51 69.09,56.69 v69.49,57.1
  Bottom 0.279: IC101.2 47.33,47.66 v47.65,47.35
  Bottom 0.406: v69.49,57.1 69.49,58.06 J505.6 | R503.2 46.99,48.9 47.62,48.26 47.62,47.37 v47.65,47.35
LRF_RXD  (via drill 0.7 pad 1.22)
  Top 0.406: v67.46,61.37 68.07,61.37 68.68,60.76 68.68,58.93 68.28,58.52 68.28,51.41 66.45,49.58 39.62,49.58 35.36,45.31 35.36,43.79 34.54,42.98 33.22,42.98 32.92,43.28 v32.92,43.99
  Bottom 0.279: IC101.30 35.4,45.15 34.24,43.99 v32.92,43.99
  Bottom 0.406: R504.2 67.41,61.42 v67.46,61.37
LRF_TXD  (via drill 0.7 pad 1.22)
  Top 0.406: v33.93,45.21 33.93,45.72 34.34,46.13 34.95,46.13 39.22,50.39 66.04,50.39 67.46,51.82 v67.46,59.54
  Bottom 0.279: IC101.31 34.89,45.66 34.44,45.21 v33.93,45.21
  Bottom 0.406: R505.2 67.31,67.31 66.04,66.04 66.04,60.55 67.06,59.54 v67.46,59.54
MCO
  Bottom 0.279: IC301.5 27.11,49.09 28.89,47.31 28.89,43.81 29.83,42.88 33.93,42.88 35.7,44.64 IC101.29
N$5
  Top 1.016: IC201.2 31.13,19.89 D201.C 39.87,20.51 L201.P$1
  pour Top (isolate 0.406, rank 2, no thermals): 31.43,17.14 29.21,19.37 29.21,22.23 32.7,22.23 34.92,23.5 41.27,23.5 42.55,22.23 42.55,17.78 41.91,17.14
N$6
  Bottom 0.279: IC101.6 48.64,45.66 49.85,44.45 Q101.1
  Bottom 0.61: C103.2 50.06,43.28 Q101.1
N$7
  Bottom 0.279: IC101.5 48.7,46.16 49.85,47.31 Q101.2
  Bottom 0.61: C102.1 50.06,48.79 Q101.2
N$15
  Top 1.27: J501.2 D501.A
  pour Top (isolate 0.406, no thermals): 7.94,11.75 13.34,11.75 13.34,14.61 7.94,14.61 7.3,14.61 6.67,13.97 6.67,12.38 7.3,11.75
N$16
  Top 1.016: IC202.2 51,15.89 D202.C 50.35,8.75 L202.P$1
  pour Top (isolate 0.406, rank 2, no thermals): 46.35,5.08 51.12,5.08 51.12,13.02 51.75,13.65 51.75,18.1 50.48,18.1 46.35,13.97
N$17
  Bottom 0.406: R201A.1 R201B.2
N$18
  Bottom 0.406: R202B.1 R202A.1
N$22
  Top 0.61: IC402.20 63.92,65.47 L401.2
N$29
  Top 0.406: IC201.4 33.45,23.29 40.01,29.84 L201.P$2
  Top 1.016: C202.+ 37.77,32.38 | 37.77,32.38 L201.P$2 | 38.87,33.48 37.77,32.38
  pour Top (isolate 0.406, no thermals): 37.78,27.62 41.91,27.62 43.18,28.89 43.18,35.88 42.86,36.2 32.07,36.2 29.53,33.66 29.53,32.07 33.97,27.62
N$31
  Bottom 0.406: C408.2 59.16,51.33 60.64,49.85 60.64,47.26 62.18,45.72 62.18,42.27 63.17,41.27 IC405.6
N$32
  Bottom 0.406: IC405.1 64.95,47.62 65.84,46.73 C409.2
N$33
  Bottom 0.61: IC405.4 65.46,43.81 C410.2
N$35
  Top 1.143: F503.1 J504.1
N$39
  Top 0.813: Q201.1 40.17,66.61 R203.2 R204.1
N$41
  Top 0.61: 12.26,47.48 D502.A 11.45,46.67 J509.4
N$43
  Top 0.406: IC402.12 64.49,55.31 65.23,56.05 R407.1
N$47
  Top 1.143: F502.1 J503.5
  Bottom 1.016: J503.5 41.27,75.35 C501.1
N$48
  Top 0.813: F504.1 J505.2
  Bottom 1.016: J505.2 69.64,69.85 C502.1
N$49
  Top 0.406: IC403.1 16.54,64.14 16.66,64.01 23.15,64.01 R414.1
N$50
  Top 0.61: IC402.2 49.91,64.2 48.9,63.18 47.8,63.18 R404.2
N$52  (via drill 0.7 pad 1.22)
  Top 0.61: 44.41,66.36 F501.2 42.61,64.52 34.24,64.52 34.04,64.31 30.58,64.31 25.6,69.29 21.74,69.29 20.12,70.92 v20.12,71.93
  Bottom 0.61: v20.12,71.93 20.12,73.67 C503.2
  Bottom 1.016: J502.5 20.95,75.35 C503.2
N$55
  Bottom 0.61: F505.1 69.11,49.85 C504.1
  Bottom 1.016: J506.2 69.64,49.53 C504.1
N$56
  Bottom 1.016: R505.1 J505.3
N$59
  Bottom 1.016: R504.1 J505.4
N$63  (via drill 0.7 pad 1.27)
  Top 1.016: L202.P$2 58.43,6.64 C210.+ 66.7,6.67 67.63,6.67 70.62,9.66 J202.2
  Bottom 0.406: R202A.2 56.62,7.09 57.47,7.94 | 57.47,7.94 v61.28,7.94 | C211.1 57.47,7.94
  pour Top (isolate 0.406, rank 2, no thermals): 55.56,4.13 68.58,4.13 72.07,7.62 72.07,16.19 74.61,18.73 74.61,20.64 66.67,20.64 66.67,18.73 69.22,16.19 69.22,10.16 67.94,8.89 55.56,8.89
N$67
  Top 0.406: IC403.4 16.54,67.94 16.66,68.07 20.19,68.07 21.59,66.67 23.18,66.67 23.28,66.57 R415.1
N$68
  Bottom 0.61: IC405.3 66.14,45.09 C409.1
N$69
  Bottom 0.406: IC405.5 64.54,42.55 65.71,41.38 C410.1
N$71
  Top 0.61: R416.1 16.51,57.95 IC404.1
N$72
  Bottom 0.406: C407.1 56.2,51.91 56.98,52.69 59.63,52.69 61.45,50.86 61.45,47.82 62.92,46.35 IC405.2
N$73
  Top 0.61: IC404.4 16.51,62.23 16.87,62.59 19.1,62.59 19.91,61.77 19.91,57.71 19.05,56.84 R417.1
N$74
  Bottom 0.61: IC405.10 57.05,40.01 R409.1
N$75
  Bottom 0.61: IC405.9 57.15,38.73 D401.C
N$77
  Top 0.61: IC402.1 R403.2
N$78
  Top 0.406: IC402.11 64.5,54.04 R406.1
N$80
  Bottom 0.813: J508.4 D503.A
N$89
  Top 0.61: R405.1 47.77,56.43 T401.1
N$90
  Top 0.61: T401.3 IC402.9
N$91
  Top 0.61: IC402.19 T402.3
N$92
  Top 0.61: 66.81,63.08 T402.1 66.67,63.22 66.67,62.55 65.55,61.42 R408.2
RST
  Bottom 0.279: IC101.7 47.24,45.15 47.94,44.45 47.94,42.86 49.21,41.59 50.16,41.59 51.02,40.74 C101.1
  Bottom 0.813: C101.1 R102.2 51.12,37.68 D101.A
RST1
  Bottom 0.279: C301.1 27.84,47.09 26.1,48.83 IC301.7
  Bottom 0.406: C301.1 R302.2 27.84,41.69 D301.A
SONY_RXD
  Bottom 0.279: IC301.21 17.8,56.17 15.88,58.1 15.88,58.42
  Bottom 0.406: 15.88,58.42 15.88,59.97 18.09,62.18 18.09,73.76 15.85,76 15.85,76.81 J502.3
SONY_TXD
  Bottom 0.279: IC301.22 18.25,56.68 17.14,57.78 17.14,58.42
  Bottom 0.406: 17.14,58.42 17.14,60.02 18.9,61.77 18.9,76.35 J502.4
SWCLK1  (via drill 0.7 pad 1.22)
  Top 0.406: v37.19,52.63 37.19,52.43 34.75,49.99 10.77,49.99 9.35,51.41 8.41,51.41 8.26,51.57 J509.2
  Bottom 0.279: IC101.37 38.21,52.21 37.8,52.63 v37.19,52.63
SWCLK2  (via drill 0.7 pad 1.22)
  Top 0.406: v32.61,66.45 34.85,66.45 35.36,66.95 35.36,68.48 34.34,69.49 30.68,69.49 29.53,70.65 J508.2
  Bottom 0.279: IC301.37 31,57.67 31.43,58.1 31.43,65.27 v32.61,66.45
SWDIO1  (via drill 0.7 pad 1.22)
  Top 0.406: v29.16,48.77 29.06,48.77 28.65,49.17 8.29,49.17 J509.3
  Bottom 0.279: IC101.34 30.47,47.16 29.16,48.46 v29.16,48.77
SWDIO2  (via drill 0.7 pad 1.22)
  Top 0.406: v34.14,67.67 34.14,68.28 33.73,68.68 28.65,68.68 26.99,70.34 J508.3
  Bottom 0.279: IC301.34 28.11,63.56 32.21,67.67 v34.14,67.67
TH_FOCUS+
  Top 0.406: J504.7 66.65,76.81 66.65,73.36 57.71,64.41 57.71,58.12 59.24,56.58 IC402.13
TH_FOCUS-
  Top 0.406: IC402.18 61.02,62.93 60.55,63.4 60.55,66.04 69.22,74.7 J504.8
TH_FOCUS_DIR  (via drill 0.7 pad 1.22)
  Top 0.406: R407.2 65.69,58.06 66.65,57.1 66.65,52.22 65.63,51.21 47.55,51.21 40.23,58.52 35.36,58.52 34.65,57.81 v34.54,57.81
  Top 0.813: R407.2 R408.1
  Bottom 0.279: IC301.41 33.15,55.69 33.97,56.52 33.97,57.24 v34.54,57.81
TH_FOCUS_PLS  (via drill 0.7 pad 1.22)
  Top 0.406: v34.24,59.44 34.34,59.33 40.64,59.33 47.95,52.02 64.19,52.02 R406.2
  Bottom 0.279: IC301.40 32.68,56.17 33.34,56.83 33.34,58.74 34.04,59.44 v34.24,59.44
TH_ZOOM+
  Top 0.406: J504.5 61.59,70.74 58.29,67.44 58.12,67.26 53.78,62.93 IC402.3
TH_ZOOM-
  Top 0.406: J504.6 64.14,72.06 56.9,64.82 56.9,58.12 55.36,56.58 IC402.8
TH_ZOOM_DIR  (via drill 0.7 pad 1.27)
  Top 0.406: v35.56,60.66 35.87,60.66 37.19,61.98 46.74,61.98 47.27,61.44 R404.1 47.69,61.37
  Top 0.61: R404.1 R405.2
  Bottom 0.279: IC301.39 32.23,56.68 32.7,57.15 32.7,59.69 33.67,60.66 v35.56,60.66
TH_ZOOM_PLS  (via drill 0.7 pad 1.27)
  Top 0.406: R403.1 47.55,65.43 44.91,62.79 35.97,62.79 v35.56,62.38
  Bottom 0.279: IC301.38 31.79,57.19 32.07,57.47 32.07,60.33 34.12,62.38 v35.56,62.38
THERMAL_A_TX  (via drill 0.7 pad 1.22)
  Bottom 0.61: IC401.6 36.83,74.83 v36.58,75.08 36.2,75.46 J503.3
THERMAL_ADC_FOCUS  (via drill 0.7 pad 1.22)
  Top 0.406: v38.2,70.1 35.15,73.15 v16.87,73.15
  Bottom 0.279: IC301.14 18.45,52.67 14.22,56.9
  Bottom 0.406: 14.22,56.9 14.22,71.12 16.26,73.15 v16.87,73.15 | R411.2 50,70.1 v38.2,70.1
THERMAL_ADC_ZOOM  (via drill 0.7 pad 1.22)
  Top 0.406: v16.87,69.49 20.04,69.49 21.27,68.26 25.2,68.26 29.86,63.6 29.87,63.6 30.07,63.4 34.34,63.4 34.54,63.6 43.69,63.6 44.22,64.14 44.27,64.14 v44.3,64.11
  Bottom 0.279: IC301.15 19.37,53.17 15.04,57.51
  Bottom 0.406: R410.2 62.23,69.95 60.15,67.87 48.06,67.87 v44.3,64.11 | 15.04,57.51 15.04,67.67 v16.87,69.49
THERMAL_B_RX  (via drill 0.7 pad 1.22)
  Bottom 0.61: IC401.7 38.1,74.88 v38.3,75.08 38.73,75.51 J503.4
THERMAL_FB_FOCUS
  Bottom 0.61: J504.3 56.52,74.93 R501.1 53.76,73.03 C412.2 R411.1
THERMAL_FB_ZOOM
  Bottom 0.61: J504.4 59.05,74.3 R502.2 58.84,71.97 C411.2 R410.1
THERMAL_PWR_EN  (via drill 0.7 pad 1.22)
  Top 0.406: 37.14,66.24 37.14,66.19 | v29.36,67.46 31.6,65.23 33.63,65.23 33.83,65.43 36.32,65.43 R204.2
  Top 0.61: 37.14,66.24 R204.2
  Bottom 0.279: IC301.32 27.11,65.82 28.75,67.46 v29.36,67.46
THERMAL_RTS
  Bottom 0.279: IC301.33 27.6,64.07 31.8,68.28 32.92,68.28 34.34,69.7 34.45,69.7
  Bottom 0.406: 34.45,69.7 36.17,69.7 36.83,69.04 IC401.3
THERMAL_RXD  (via drill 0.7 pad 1.22)
  Bottom 0.279: IC301.42 33.64,55.18 35.29,56.83 35.9,56.83 v36.17,57.1
  Bottom 0.406: IC401.4 35.56,66.04 36.88,64.72 36.88,57.81 v36.17,57.1
THERMAL_TXD  (via drill 0.7 pad 1.22)
  Bottom 0.279: IC301.43 34.04,54.67 35.24,55.88 37.8,55.88 v39.01,57.1
  Bottom 0.406: IC401.1 39.37,57.45 v39.01,57.1
THERMAL_VDD
  Top 1.016: F502.2 Q201.3
V-  (via drill 0.7 pad 1.22, 0.7 pad 1.27)
  Top 0.61: SJ202.2 60.64,2.54
  Top 1.016: IC201.3 IC201.6 20.55,24.99 25.08,24.99 | D201.A 31.54,24.99 IC201.5 25.08,24.99 | D202.A 56.11,16.29 IC202.5 56.11,25.81 52.7,29.21 | IC202.3 52.7,29.21 | 52.7,29.21 IC202.6 | C210.- 55.35,14.95 D202.A | 14.29,10.79 21.61,3.47 C201.- C206.- 51.73,3.47 53.34,5.08 53.34,9.53 54.93,11.11 54.93,15.11 D202.A | C202.- 25.32,25.24 25.08,24.99
  Top 1.27: J501.1 14.29,10.79 14.61,11.11 14.61,19.05 | 60.64,2.54 58.74,2.54
  Top 1.422: 14.61,19.05 IC201.6
  Bottom 0.61: SJ201.2 18.68,34.02 19.68,33.02
  Bottom 1.016: v62.55,14.29 R201B.1
  other vias: 14.61,6.99 16.83,3.49 53.02,2.86 60.96,19.68 23.5,27.62 26.99,27.62 45.4,26.67
  pour Top (isolate 0.406, rank 5): 6.35,9.53 15.88,0 59.05,0 68.9,9.84 68.9,24.13 56.52,36.51 21.27,36.51 9.53,24.77 9.53,14.61 6.35,11.43
  pour Bottom (isolate 0.406, rank 5): 6.35,9.53 15.88,0 59.05,0 69.22,10.16 69.22,23.81 56.52,36.51 21.27,36.51 9.53,24.77 9.53,14.61 6.35,11.43
VDD  (via drill 0.7 pad 1.22)
  Top 0.406: D502.C 23.61,47.51 29.67,41.45 v32.31,41.45
  Bottom 0.279: C106.2 35.89,48.15 IC101.36 37.99,48.15 38.1,48.26 | C105.2 43.7,51.11 IC101.48 43.7,47.1 43.81,46.99 43.81,46.67 43.5,46.35 42.55,46.35 41.91,45.72 41.91,44.13 42.23,43.81 43.5,43.81 43.84,44.16 IC101.9 46.33,44.16 46.67,43.81 46.67,41.59 46.14,41.06 C104.2 | 38.42,44.45 38.1,44.13 38.1,42.55 38.21,42.43 IC101.24 38.21,40.75 37.68,40.22 C107.2
  Bottom 0.406: C107.2 34.76,40.22 33.53,41.45 v32.31,41.45 | R503.1 46.99,51.44 46.57,51.85 C105.2
  Bottom 0.813: L101.1 D101.C 49.22,37.68 R102.1 49.3,37.8 48.16,37.8 46.14,39.81 C104.2
  pour Bottom (isolate 0.305, rank 2): 37.78,42.23 44.13,42.23 44.13,48.58 37.78,48.58
VDD1
  Bottom 0.279: 29.21,57.15 29.1,57.26 IC301.36 29.1,60 C305.2 | 29.21,52.07 29.32,52.18 IC301.48 30.57,50.61 C306.2 30.57,50.79 | C304.2 21.28,57.67 IC301.24 24.88,57.67 25.08,57.47
  Bottom 0.406: R302.1 26.04,44.03 D301.C 26.04,39.21 L301.1 | L302.1 24.61,43.71 23.77,42.88 22.35,42.88 21.74,43.48 21.74,50.32 25.08,53.66 25.08,57.47 | C304.2 24.45,62.97 D503.C 25.55,67.41 27.23,69.09 32.51,69.09 34.75,71.32 38.81,71.32 39.32,71.83 39.32,73.05 IC401.8
  Bottom 0.813: L302.1 R302.1
  pour Bottom (isolate 0.305, rank 2): 23.18,51.75 29.53,51.75 29.53,58.1 23.18,58.1
VDDA1
  Bottom 0.279: IC301.9 25.11,48.6 24.45,47.94 23.5,47.94 22.96,47.41 C307.2
  Bottom 0.406: C307.2 22.96,44.19 L302.2
VIDEO-
  Top 0.406: J501.8 6.78,28.57 2.85,32.51 2.85,70.31 9.35,76.81 10.77,76.81 J502.1 10.79,76.58 12.6,74.78 29.06,74.78 J503.1
VIDEO_SONY+
  Top 0.406: J501.7 8.1,26.04 2.03,32.11 2.03,70.71 9.75,78.44 12.19,78.44 13.34,77.29 J502.2
VIDEO_THERMAL+
  Top 0.406: J501.6 8.2,23.5 1.22,30.48 1.22,71.12 9.35,79.25 12.83,79.25 13.65,78.42 32.38,78.42 33.66,77.15 J503.2

## Text on the board
Bottom: RCWS - optronik_v2.0.0 | PT. Respati Solusi Rekatama